# Altium PCB mezza.PcbDoc
Units mm, origin at the board's own origin, x right, y up, seen from the top; angles counter-clockwise.
Board outline 85 x 54 mm, 4 copper layers (Component Side, Ground Plane, Power Plane, Solder Side), stack 0.844 mm thick; 47 components, 91 nets, 338 pads, 80 vias.
Unrouted connection lines stored in the file: 79.
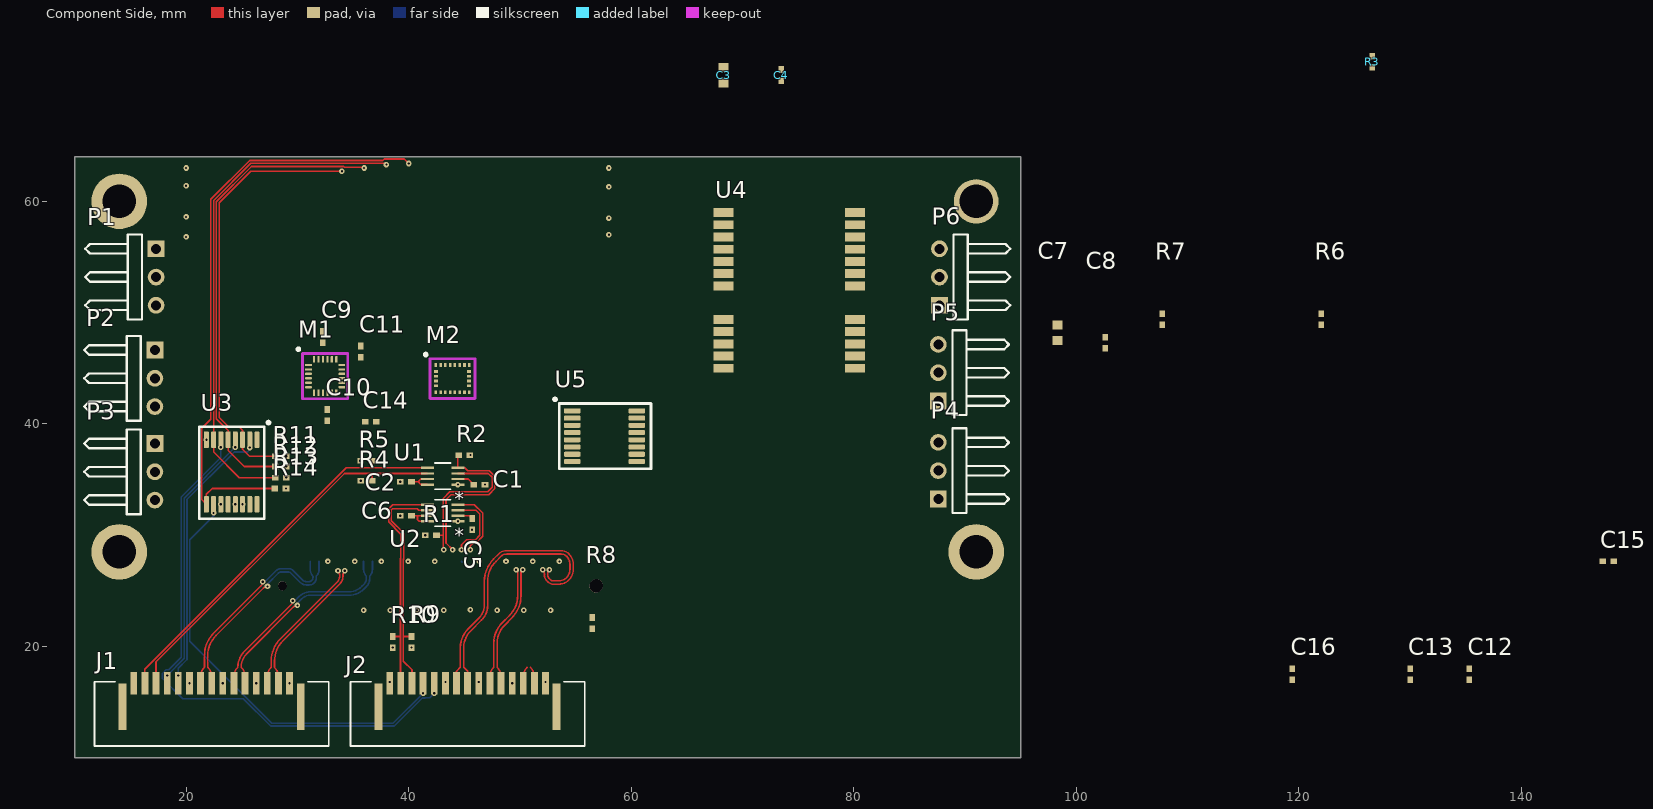
[diagram p0: Component Side view]
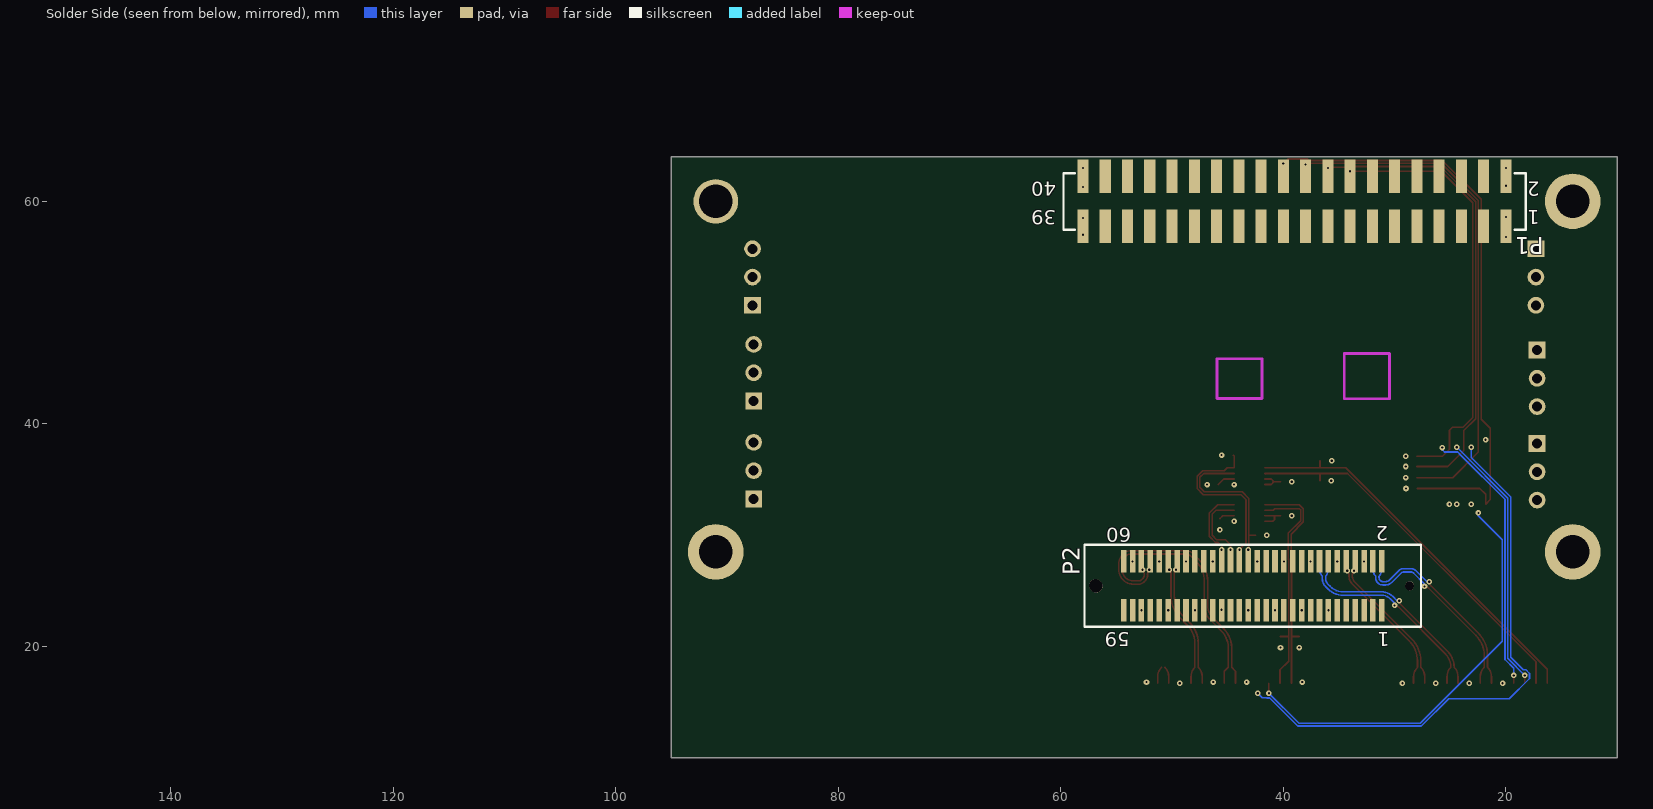
[diagram p1: Solder Side view, seen from below]
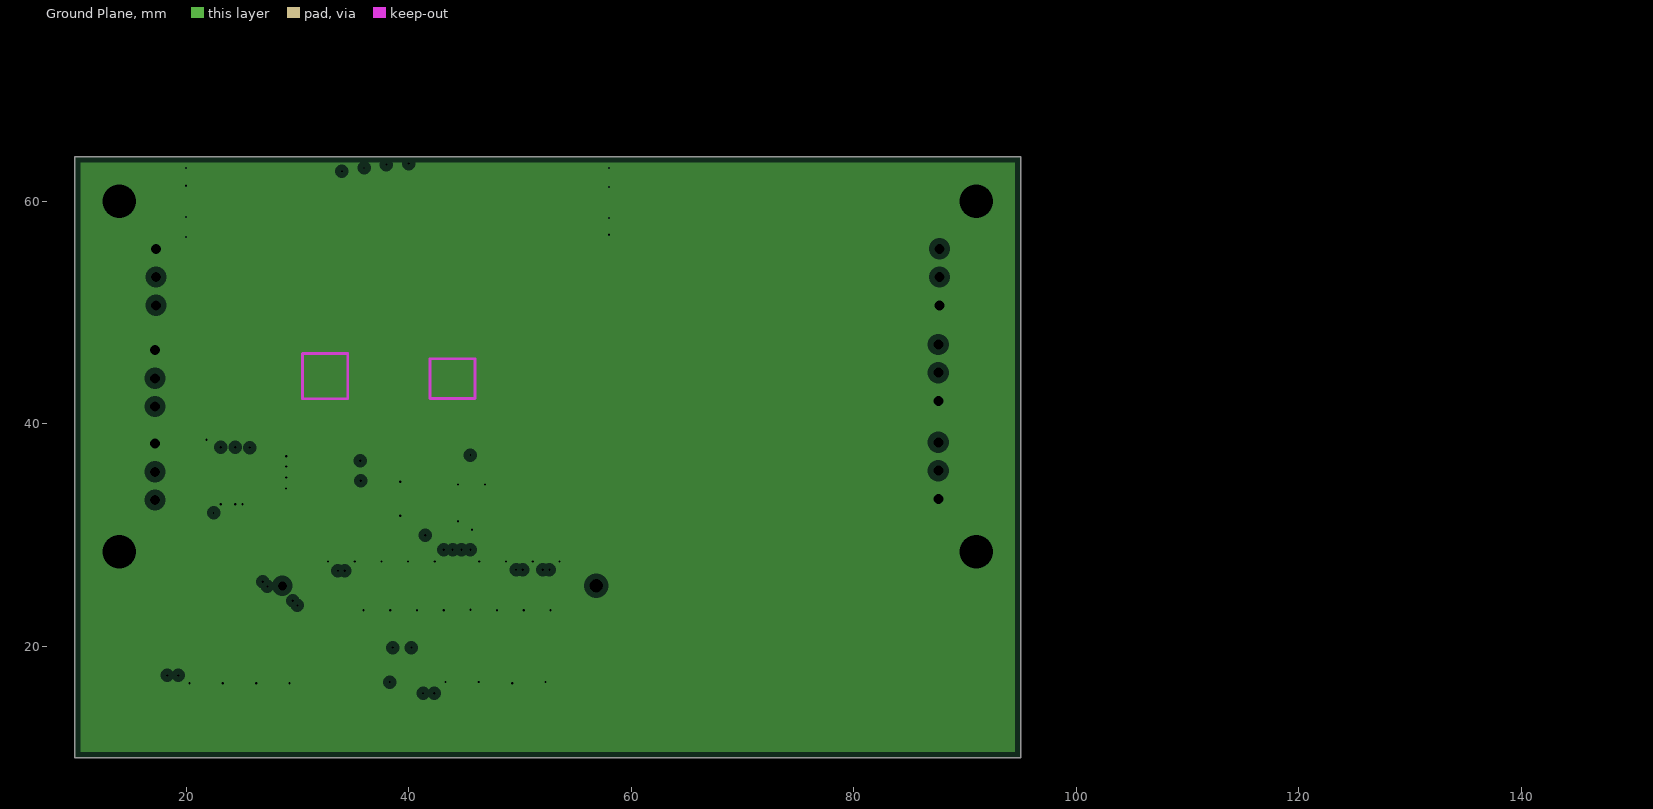
[diagram p2: Ground Plane, clearances drawn from the general rule]
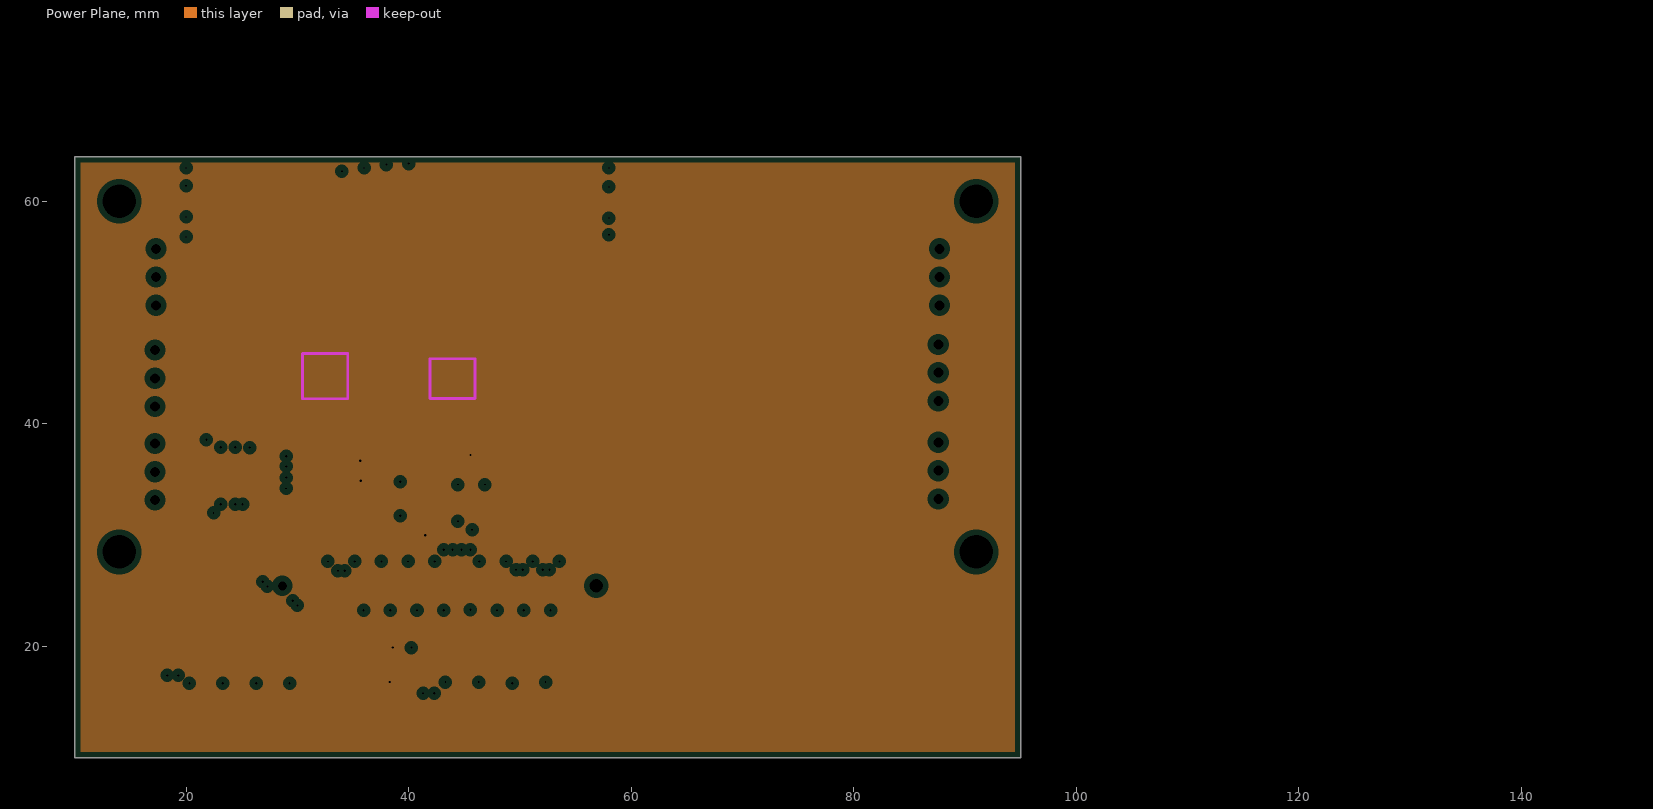
[diagram p3: Power Plane, clearances drawn from the general rule]

## Layer stack, top to bottom
Top Solder: solder mask 0.0102, Solder Resist, Dk 3.5
Component Side: signal copper 0.0356
Dielectric 1: core 0.32, FR-4, Dk 4.8
Ground Plane: plane copper 0.036, net GND
Dielectric 3: prepreg 0.127, Dk 4.2
Power Plane: plane copper 0.036, net 3V3
Dielectric 4: core 0.254, Dk 4.2
Solder Side: signal copper 0.0356
Bottom Solder: solder mask 0.0102, Solder Resist, Dk 3.5

## Board outline
10,10 95,10 95,64 10,64

## Design rules (kind name [scope] priority, off if disabled: settings)
Clearance [All] p1: gap=0.1 ignorepadtopadclearanceinfootprint=FALSE
DiffPairsRouting "Schematic Differential Pairs Routing_35" [InNet('EXP_D5_N')] p1: maxlimit=0.254 minlimit=0.1 mostfreqgap=0.15 toplayer_minwidth=0.1 toplayer_maxwidth=0.381 toplayer_prefwidth=0.15 bottomlayer_minwidth=0.1 bottomlayer_maxwidth=0.381 bottomlayer_prefwidth=0.15 maxuncoupledlength=12.7
DiffPairsRouting "Schematic Differential Pairs Routing_34" [InNet('EXP_D5_P')] p2: maxlimit=0.254 minlimit=0.1 mostfreqgap=0.15 toplayer_minwidth=0.1 toplayer_maxwidth=0.381 toplayer_prefwidth=0.15 bottomlayer_minwidth=0.1 bottomlayer_maxwidth=0.381 bottomlayer_prefwidth=0.15 maxuncoupledlength=12.7
DiffPairsRouting "Schematic Differential Pairs Routing_33" [InNet('EXP_D6_N')] p3: maxlimit=0.254 minlimit=0.1 mostfreqgap=0.15 toplayer_minwidth=0.1 toplayer_maxwidth=0.381 toplayer_prefwidth=0.15 bottomlayer_minwidth=0.1 bottomlayer_maxwidth=0.381 bottomlayer_prefwidth=0.15 maxuncoupledlength=12.7
DiffPairsRouting "Schematic Differential Pairs Routing_32" [InNet('EXP_D6_P')] p4: maxlimit=0.254 minlimit=0.1 mostfreqgap=0.15 toplayer_minwidth=0.1 toplayer_maxwidth=0.381 toplayer_prefwidth=0.15 bottomlayer_minwidth=0.1 bottomlayer_maxwidth=0.381 bottomlayer_prefwidth=0.15 maxuncoupledlength=12.7
DiffPairsRouting "Schematic Differential Pairs Routing_31" [InNet('CAM2_C_N')] p5: maxlimit=0.254 minlimit=0.1 mostfreqgap=0.15 toplayer_minwidth=0.1 toplayer_maxwidth=0.381 toplayer_prefwidth=0.15 bottomlayer_minwidth=0.1 bottomlayer_maxwidth=0.381 bottomlayer_prefwidth=0.15 maxuncoupledlength=12.7
DiffPairsRouting "Schematic Differential Pairs Routing_30" [InNet('CAM2_C_P')] p6: maxlimit=0.254 minlimit=0.1 mostfreqgap=0.15 toplayer_minwidth=0.1 toplayer_maxwidth=0.381 toplayer_prefwidth=0.15 bottomlayer_minwidth=0.1 bottomlayer_maxwidth=0.381 bottomlayer_prefwidth=0.15 maxuncoupledlength=12.7
DiffPairsRouting "Schematic Differential Pairs Routing_29" [InNet('CAM2_D0_N')] p7: maxlimit=0.254 minlimit=0.1 mostfreqgap=0.15 toplayer_minwidth=0.1 toplayer_maxwidth=0.381 toplayer_prefwidth=0.15 bottomlayer_minwidth=0.1 bottomlayer_maxwidth=0.381 bottomlayer_prefwidth=0.15 maxuncoupledlength=12.7
DiffPairsRouting "Schematic Differential Pairs Routing_28" [InNet('CAM2_D0_P')] p8: maxlimit=0.254 minlimit=0.1 mostfreqgap=0.15 toplayer_minwidth=0.1 toplayer_maxwidth=0.381 toplayer_prefwidth=0.15 bottomlayer_minwidth=0.1 bottomlayer_maxwidth=0.381 bottomlayer_prefwidth=0.15 maxuncoupledlength=12.7
DiffPairsRouting "Schematic Differential Pairs Routing_27" [InNet('CAM2_D1_N')] p9: maxlimit=0.254 minlimit=0.1 mostfreqgap=0.15 toplayer_minwidth=0.1 toplayer_maxwidth=0.381 toplayer_prefwidth=0.15 bottomlayer_minwidth=0.1 bottomlayer_maxwidth=0.381 bottomlayer_prefwidth=0.15 maxuncoupledlength=12.7
DiffPairsRouting "Schematic Differential Pairs Routing_26" [InNet('CAM2_D1_P')] p10: maxlimit=0.254 minlimit=0.1 mostfreqgap=0.15 toplayer_minwidth=0.1 toplayer_maxwidth=0.381 toplayer_prefwidth=0.15 bottomlayer_minwidth=0.1 bottomlayer_maxwidth=0.381 bottomlayer_prefwidth=0.15 maxuncoupledlength=12.7
DiffPairsRouting "Schematic Differential Pairs Routing_25" [InNet('CAM1_C_N')] p11: maxlimit=0.254 minlimit=0.1 mostfreqgap=0.15 toplayer_minwidth=0.1 toplayer_maxwidth=0.381 toplayer_prefwidth=0.15 bottomlayer_minwidth=0.1 bottomlayer_maxwidth=0.381 bottomlayer_prefwidth=0.15 maxuncoupledlength=12.7
DiffPairsRouting "Schematic Differential Pairs Routing_21" [InNet('CAM1_D1_P')] p12: maxlimit=0.254 minlimit=0.1 mostfreqgap=0.15 toplayer_minwidth=0.1 toplayer_maxwidth=0.381 toplayer_prefwidth=0.15 bottomlayer_minwidth=0.1 bottomlayer_maxwidth=0.381 bottomlayer_prefwidth=0.15 maxuncoupledlength=12.7
DiffPairsRouting "Schematic Differential Pairs Routing_18" [InNet('EXP_D3_N')] p13: maxlimit=0.254 minlimit=0.1 mostfreqgap=0.15 toplayer_minwidth=0.1 toplayer_maxwidth=0.381 toplayer_prefwidth=0.15 bottomlayer_minwidth=0.1 bottomlayer_maxwidth=0.381 bottomlayer_prefwidth=0.15 maxuncoupledlength=12.7
DiffPairsRouting "Schematic Differential Pairs Routing_17" [InNet('EXP_D2_P')] p14: maxlimit=0.254 minlimit=0.1 mostfreqgap=0.15 toplayer_minwidth=0.1 toplayer_maxwidth=0.381 toplayer_prefwidth=0.15 bottomlayer_minwidth=0.1 bottomlayer_maxwidth=0.381 bottomlayer_prefwidth=0.15 maxuncoupledlength=12.7
DiffPairsRouting "Schematic Differential Pairs Routing_16" [InNet('EXP_D2_N')] p15: maxlimit=0.254 minlimit=0.1 mostfreqgap=0.15 toplayer_minwidth=0.1 toplayer_maxwidth=0.381 toplayer_prefwidth=0.15 bottomlayer_minwidth=0.1 bottomlayer_maxwidth=0.381 bottomlayer_prefwidth=0.15 maxuncoupledlength=12.7
DiffPairsRouting "Schematic Differential Pairs Routing_15" [InNet('EXP_D1_P')] p16: maxlimit=0.254 minlimit=0.1 mostfreqgap=0.15 toplayer_minwidth=0.1 toplayer_maxwidth=0.381 toplayer_prefwidth=0.15 bottomlayer_minwidth=0.1 bottomlayer_maxwidth=0.381 bottomlayer_prefwidth=0.15 maxuncoupledlength=12.7
DiffPairsRouting "Schematic Differential Pairs Routing_14" [InNet('EXP_D4_N')] p17: maxlimit=0.254 minlimit=0.1 mostfreqgap=0.15 toplayer_minwidth=0.1 toplayer_maxwidth=0.381 toplayer_prefwidth=0.15 bottomlayer_minwidth=0.1 bottomlayer_maxwidth=0.381 bottomlayer_prefwidth=0.15 maxuncoupledlength=12.7
DiffPairsRouting "Schematic Differential Pairs Routing_13" [InNet('EXP_D3_P')] p18: maxlimit=0.254 minlimit=0.1 mostfreqgap=0.15 toplayer_minwidth=0.1 toplayer_maxwidth=0.381 toplayer_prefwidth=0.15 bottomlayer_minwidth=0.1 bottomlayer_maxwidth=0.381 bottomlayer_prefwidth=0.15 maxuncoupledlength=12.7
DiffPairsRouting "Schematic Differential Pairs Routing_12" [InNet('CAM1_D0_N')] p19: maxlimit=0.254 minlimit=0.1 mostfreqgap=0.15 toplayer_minwidth=0.1 toplayer_maxwidth=0.381 toplayer_prefwidth=0.15 bottomlayer_minwidth=0.1 bottomlayer_maxwidth=0.381 bottomlayer_prefwidth=0.15 maxuncoupledlength=12.7
DiffPairsRouting "Schematic Differential Pairs Routing_11" [InNet('CAM1_C_P')] p20: maxlimit=0.254 minlimit=0.1 mostfreqgap=0.15 toplayer_minwidth=0.1 toplayer_maxwidth=0.381 toplayer_prefwidth=0.15 bottomlayer_minwidth=0.1 bottomlayer_maxwidth=0.381 bottomlayer_prefwidth=0.15 maxuncoupledlength=12.7
DiffPairsRouting "Schematic Differential Pairs Routing_9" [InNet('EXP_D0_N')] p21: maxlimit=0.254 minlimit=0.1 mostfreqgap=0.15 toplayer_minwidth=0.1 toplayer_maxwidth=0.381 toplayer_prefwidth=0.15 bottomlayer_minwidth=0.1 bottomlayer_maxwidth=0.381 bottomlayer_prefwidth=0.15 maxuncoupledlength=12.7
DiffPairsRouting "Schematic Differential Pairs Routing_8" [InNet('EXP_D1_N')] p22: maxlimit=0.254 minlimit=0.1 mostfreqgap=0.15 toplayer_minwidth=0.1 toplayer_maxwidth=0.381 toplayer_prefwidth=0.15 bottomlayer_minwidth=0.1 bottomlayer_maxwidth=0.381 bottomlayer_prefwidth=0.15 maxuncoupledlength=12.7
DiffPairsRouting "Schematic Differential Pairs Routing_7" [InNet('EXP_D0_P')] p23: maxlimit=0.254 minlimit=0.1 mostfreqgap=0.15 toplayer_minwidth=0.1 toplayer_maxwidth=0.381 toplayer_prefwidth=0.15 bottomlayer_minwidth=0.1 bottomlayer_maxwidth=0.381 bottomlayer_prefwidth=0.15 maxuncoupledlength=12.7
DiffPairsRouting "Schematic Differential Pairs Routing_6" [InNet('CAM1_D1_N')] p24: maxlimit=0.254 minlimit=0.1 mostfreqgap=0.15 toplayer_minwidth=0.1 toplayer_maxwidth=0.381 toplayer_prefwidth=0.15 bottomlayer_minwidth=0.1 bottomlayer_maxwidth=0.381 bottomlayer_prefwidth=0.15 maxuncoupledlength=12.7
DiffPairsRouting "Schematic Differential Pairs Routing_5" [InNet('CAM1_D0_P')] p25: maxlimit=0.254 minlimit=0.1 mostfreqgap=0.15 toplayer_minwidth=0.1 toplayer_maxwidth=0.381 toplayer_prefwidth=0.15 bottomlayer_minwidth=0.1 bottomlayer_maxwidth=0.381 bottomlayer_prefwidth=0.15 maxuncoupledlength=12.7
DiffPairsRouting "Schematic Differential Pairs Routing" [InNet('EXP_D4_P')] p26: maxlimit=0.254 minlimit=0.1 mostfreqgap=0.15 toplayer_minwidth=0.1 toplayer_maxwidth=0.381 toplayer_prefwidth=0.15 bottomlayer_minwidth=0.1 bottomlayer_maxwidth=0.381 bottomlayer_prefwidth=0.15 maxuncoupledlength=12.7
DiffPairsRouting [InDifferentialPair('No Differential Pair')] p27: maxlimit=0.254 minlimit=0.254 mostfreqgap=0.254 toplayer_minwidth=0.381 toplayer_maxwidth=0.381 toplayer_prefwidth=0.381 bottomlayer_minwidth=0.381 bottomlayer_maxwidth=0.381 bottomlayer_prefwidth=0.381 maxuncoupledlength=12.7
HoleSize [All] p1: absolutevalues=TRUE maxlimit=6.2 minlimit=0.2 maxpercent=80.000 minpercent=20.000
MinimumAnnularRing [All] p1: minimumring=0.15
PlaneClearance [All] p1: clearance=0.508
PlaneConnect [All] p1: planeconnectstyle=Relief reliefexpansion=0.508 reliefentries=4 reliefconductorwidth=0.254 reliefairgap=0.254
PolygonConnect [All] p1: connectstyle=Relief reliefconductorwidth=0.254 reliefentries=4 polygonreliefangle="90 Angle" airgapwidth=0.254
RoomDefinition mezza [InComponentClass('mezza')] p1: confinementstyle=ConfineOut formatcopy=TRUE lockcomponents=FALSE outline 58,25.7 95,25.7 95,10 58,10
RoutingVias [All] p1: holewidth=0.3 width=0.75 viastyle="Through Hole" minholewidth=0.2 minwidth=0.5 maxholewidth=0.711 maxwidth=1.27
SolderMaskExpansion [All] p1: expansion=0.102
Width [All] p1: maxlimit=0.254 minlimit=0.1 preferedwidth=0.15
26 further rules are at their usual default settings.

## Classes and differential pairs
component class esc: P1 P2 P3 P4 P5 P6 U5
differential pair class CSI: CAM1_C CAM1_D0 CAM1_D1 CAM2_C CAM2_D0 CAM2_D1 EXP_D0 EXP_D1 EXP_D2 EXP_D3 EXP_D4 EXP_D5 EXP_D6
component class GPS: U4
component class 9DOF_Sensors: C10 C11 C12 C13 C14 C15 C16 C? M1 M2
component class Camera: C1 C2 C3 C4 C5 C6 C7 C8 J1 J2 R1 R2 R3 R4 R5 R6 R7 R8 R9 R10 R11 R12 R13 R14 U1 U2 U3
component class mezza: P1 P2
differential pair USB_D: +USB_D_P -USB_D_N
differential pair EXP_D6: +EXP_D6_P -EXP_D6_N
differential pair EXP_D5: +EXP_D5_P -EXP_D5_N
differential pair EXP_D4: +EXP_D4_P -EXP_D4_N
differential pair EXP_D3: +HSIC_STR -EXP_D3_N
differential pair EXP_D2: +EXP_D2_P -EXP_D2_N
differential pair EXP_D1: +EXP_D1_P -EXP_D1_N
differential pair EXP_D0: +EXP_D0_P -EXP_D0_N
differential pair CAM2_D1: +CAM2_D1_P -CAM2_D1_N
differential pair CAM2_D0: +CAM2_D0_P -CAM2_D0_N
differential pair CAM2_C: +CAM2_C_P -CAM2_C_N
differential pair CAM1_D1: +CAM1_D1_P -CAM1_D1_N
differential pair CAM1_D0: +CAM1_D0_P -CAM1_D0_N
differential pair CAM1_C: +CAM1_C_P -CAM1_C_N

## Components (designator, comment, footprint, x,y, rotation, side; value= is the part's Value field where it differs from the comment)
C1 "Cap" 0402 46.354,34.55 r180 top value=0.1uF
C2 "Cap" 0402 39.754,34.8 r0 top value=0.1uF
C3 "0603" 1608[0603] 68.3,71.35 r90 top value=10uF
C4 "0402" 0402 73.5,71.35 r90 top value=0.1uF
C5 "Cap" 0402 45.7,31 r90 top value=0.1uF
C6 "Cap" 0402 39.754,31.75 r0 top value=0.1uF
C7 "0603" 1608[0603] 98.3,48.2 r90 top value=10uF
C8 "0402" 0402 102.6,47.3 r90 top value=0.1uF
C9 "Ceramic, X7R, 0.1uF +- 10%, 2V" 0402 32.3,47.8 r90 top value=10nF
C10 "Ceramic, X7R, 0.1uF +- 10%, 2V" 0402 32.701,40.8 r270 top value=0.1uF
C11 "Ceramic, X7R, 0.1uF +- 10%, 4V" 0402 35.7,46.5 r90 top value=0.1uF
C12 "Cap" 0402 135.3,17.5 r90 top value=100nF
C13 "Cap" 0402 130,17.5 r90 top value=10uF
C14 "Cap" 0402 36.6,40.2 r180 top value=100nF
C15 "Cap" 0402 147.8,27.65 r180 top value=100nF
C16 "Cap" 0402 119.4,17.5 r90 top value=10uF
J1 "FCC_Connector" CON15_1X15_DRB_S 22.3,19.456 r180 top locked
J2 "FCC_Connector" CON15_1X15_DRB_S 45.3,19.456 r180 top locked
M1 "MPU-9250" MPU-9250 32.5,44.3 r0 top locked
M2 "LSM9DS1" LSM9DS1 43.945,44.075 r0 top locked
P1 "Header 3H" HDR1X3H 17.3,55.74 r270 top
P1 "low-speed_connector" low-speed_connector_SM 20,61 r0 bottom locked
P2 "Header 3H" HDR1X3H 17.2,46.64 r270 top
P2 "High-speed_connector" high-speed_connector 42.75,25.45 r0 bottom locked
P3 "Header 3H" HDR1X3H 17.2,38.24 r270 top
P4 "Header 3H" HDR1X3H 87.6,33.26 r90 top
P5 "Header 3H" HDR1X3H 87.6,42.06 r90 top
P6 "Header 3H" HDR1X3H 87.7,50.66 r90 top
R1 "Res1" 0402 42,30 r0 top
R2 "Res1" 0402 45,37.2 r180 top
R3 "Res1" 0402 126.6,72.55 r90 top
R4 "Res1" 0402 36.2,34.9 r0 top
R5 "Res1" 0402 36.2,36.7 r0 top
R6 "Res1" 0402 122,49.4 r90 top
R7 "Res1" 0402 107.7,49.4 r90 top
R8 "Res1" 0402 56.5,22.1 r90 top
R9 "Res1" 0402 40.254,20.4 r90 top
R10 "Res1" 0402 38.563,20.4 r90 top
R11 "Res1" 0402 28.5,37.1 r0 top
R12 "Res1" 0402 28.5,36.177 r0 top
R13 "Res1" 0402 28.5,35.177 r0 top
R14 "Res1" 0402 28.482,34.2 r0 top
U1 "PCA9306DP1" DCU8 43.054,35.3 r180 top locked
U2 "PCA9306DP1" DCU8 43.054,32 r180 top locked
U3 "CD4504BPWR" CD4504BPWR_16TSSOP 24.1,35.677 r270 top locked
U4 "NEO-8Q/M8" NEO-8Q/M8 80.3,60 r180 top
U5 "CD4504BPWR" CD4504BPWR_16TSSOP 57.6,38.9 r0 top

## Footprints (in the part's own frame and the unit in brackets; to place one, negate y for a bottom-side part, rotate by r counter-clockwise, add the part's x,y. Pads: shape width x height; smd on the part's side, far side on the other; paste and mask are expansions set on the pad)
0402 [mm] "Chip Capacitor, Body 1.0x0.5mm, IPC High Density"
  rect 0.6x0.5 smd: 1(-0.5,0) 2(0.5,0)
  body extent -0.55,-0.3 0.55,0.3, height 1.3
1608[0603] [mm] "Chip Capacitor, Body 1.6x0.8mm, IPC High Density"
  rect 0.8x0.9 smd: 1(-0.7,0) 2(0.7,0)
  body extent -0.87,-0.48 0.87,0.48, height 1.3
CD4504BPWR_16TSSOP [mm]
  rrect50% 1.5x0.45 smd: 1(-2.9,2.275) 2(-2.9,1.625) 3(-2.9,0.975) 4(-2.9,0.325) 5(-2.9,-0.325) 6(-2.9,-0.975) 7(-2.9,-1.625) 8(-2.9,-2.275) 9(2.9,-2.275) 10(2.9,-1.625) 11(2.9,-0.975) 12(2.9,-0.325) 13(2.9,0.325) 14(2.9,0.975) 15(2.9,1.625) 16(2.9,2.275)
  silkscreen extent -4.57,-2.92 4.19,3.43
CON15_1X15_DRB_S [mil]
  rect 24x79 smd: 1(275.59,108.5) 2(236.22,108.5) 3(196.85,108.5) 4(157.48,108.5) 5(118.11,108.5) 6(78.74,108.5) 7(39.37,108.5) 8(0,108.5) 9(-39.37,108.5) 10(-78.74,108.5) 11(-118.11,108.5) 12(-157.48,108.5) 13(-196.85,108.5) 14(-236.22,108.5) 15(-275.59,108.5)
  rect 28x165 smd: 16(-315,191.5) 17(315,191.5)
  silkscreen extent -415,103 415,331, body extent 0,0 10,10, height 10
DCU8 [mm]
  rect 1.157x0.214 smd paste+0 mask+0: 1(-1.372,0.75) 2(-1.372,0.25) 3(-1.372,-0.25) 4(-1.372,-0.75) 5(1.372,-0.75) 6(1.372,-0.25) 7(1.372,0.25) 8(1.372,0.75)
  silkscreen extent -0.72,-1.18 0.72,1.18, body extent -1.6,-1.05 1.6,1.05, height 0.89
HDR1X3H [mm] "Connector; Header; 3 Position; Right Angle"
  rect 1.5x1.5 hole 0.9: 1(0,0)
  round 1.5 hole 0.9: 2(2.54,0) 3(5.08,0)
  silkscreen extent -1.27,-6.35 6.35,-1.27
high-speed_connector [mm] "high-speed connector"
  rect 0.5x2 smd: 1(-11.6,2.2) 2(-11.6,-2.2) 3(-10.8,2.2) 4(-10.8,-2.2) 5(-10,2.2) 6(-10,-2.2) 7(-9.2,2.2) 8(-9.2,-2.2) 9(-8.4,2.2) 10(-8.4,-2.2) 11(-7.6,2.2) 12(-7.6,-2.2) 13(-6.8,2.2) 14(-6.8,-2.2) 15(-6,2.2) 16(-6,-2.2) 17(-5.2,2.2) 18(-5.2,-2.2) 19(-4.4,2.2) 20(-4.4,-2.2) 21(-3.6,2.2) 22(-3.6,-2.2) 23(-2.8,2.2) 24(-2.8,-2.2) 25(-2,2.2) 26(-2,-2.2) 27(-1.2,2.2) 28(-1.2,-2.2) 29(-0.4,2.2) 30(-0.4,-2.2) 31(0.4,2.2) 32(0.4,-2.2) 33(1.2,2.2) 34(1.2,-2.2) 35(2,2.2) 36(2,-2.2) 37(2.8,2.2) 38(2.8,-2.2) 39(3.6,2.2) 40(3.6,-2.2) 41(4.4,2.2) 42(4.4,-2.2) 43(5.2,2.2) 44(5.2,-2.2) 45(6,2.2) 46(6,-2.2) 47(6.8,2.2) 48(6.8,-2.2) 49(7.6,2.2) 50(7.6,-2.2) 51(8.4,2.2) 52(8.4,-2.2) 53(9.2,2.2) 54(9.2,-2.2) 55(10,2.2) 56(10,-2.2) 57(10.8,2.2) 58(10.8,-2.2) 59(11.6,2.2) 60(11.6,-2.2)
  round 0.8 hole 0.8 unplated: ""(-14.1,0)
  round 1.2 hole 1.2 unplated: ""(14.1,0)
  silkscreen extent -15.11,-3.68 15.11,3.68, body extent -14.9,-3 14.9,3, height 7.65
low-speed_connector_SM [mm] "Surface mount low-speed connector / 2mm pitch"
  rect 1x3 smd: 1(0,3.25) 2(0,-1.25) 3(2,3.25) 4(2,-1.25) 5(4,3.25) 6(4,-1.25) 7(6,3.25) 8(6,-1.25) 9(8,3.25) 10(8,-1.25) 11(10,3.25) 12(10,-1.25) 13(12,3.25) 14(12,-1.25) 15(14,3.25) 16(14,-1.25) 17(16,3.25) 18(16,-1.25) 19(18,3.25) 20(18,-1.25) 21(20,3.25) 22(20,-1.25) 23(22,3.25) 24(22,-1.25) 25(24,3.25) 26(24,-1.25) 27(26,3.25) 28(26,-1.25) 29(28,3.25) 30(28,-1.25) 31(30,3.25) 32(30,-1.25) 33(32,3.25) 34(32,-1.25) 35(34,3.25) 36(34,-1.25) 37(36,3.25) 38(36,-1.25) 39(38,3.25) 40(38,-1.25)
  silkscreen extent -1.78,-1.52 39.75,3.56, body extent -1.65,-2.29 39.62,4.3, height 6
LSM9DS1 [mm]
  rect 0.23x0.35 smd mask+0.05: 1(-1.505,1.225) 6(-1.505,-1.225) 7(-1.075,-1.225) 8(-0.645,-1.225) 9(-0.215,-1.225) 10(0.215,-1.225) 11(0.645,-1.225) 12(1.075,-1.225) 13(1.505,-1.225) 18(1.505,1.225) 19(1.075,1.225) 20(0.645,1.225) 21(0.215,1.225) 22(-0.215,1.225) 23(-0.645,1.225) 24(-1.075,1.225)
  rect 0.35x0.23 smd mask+0.05: 2(-1.475,0.635) 3(-1.475,0.215) 4(-1.475,-0.215) 5(-1.475,-0.635) 14(1.475,-0.635) 15(1.475,-0.215) 16(1.475,0.215) 17(1.475,0.635)
  Keep-Out Layer lines w0.254: -2.032,-1.778 2.032,-1.778 2.032,1.778 -2.032,1.778 -2.032,-1.778
  silkscreen extent -2.54,2.03 -2.29,2.29
MPU-9250 [mm]
  rrect50% 0.6x0.2 smd mask+0.05: 1(-1.5,1) 2(-1.5,0.6) 3(-1.5,0.2) 4(-1.5,-0.2) 5(-1.5,-0.6) 6(-1.5,-1) 14(1.5,-0.6) 15(1.5,-0.2) 16(1.5,0.2) 17(1.5,0.6) 18(1.5,1)
  rrect50% 0.2x0.6 smd mask+0.05: 7(-1,-1.5) 8(-0.6,-1.5) 9(-0.2,-1.5) 10(0.2,-1.5) 11(0.6,-1.5) 12(1,-1.5) 19(1,1.5) 20(0.6,1.5) 21(0.2,1.5) 22(-0.2,1.5) 23(-0.6,1.5) 24(-1,1.5)
  rrect50% 0.6x0.2 smd paste+0 mask+0.05: 13(1.5,-1)
  Keep-Out Layer lines w0.254: -2.032,-2.032 -2.032,2.032 2.032,2.032 2.032,-2.032 -2.032,-2.032
  silkscreen extent -2.54,2.29 -2.29,2.54
NEO-8Q/M8 [mm]
  rect 1.8x0.8 smd mask+0.1: 1(12,1)
  rect 1.8x0.8 smd: 2(12,2.1) 3(12,3.2) 4(12,4.3) 5(12,5.4) 6(12,6.5) 7(12,7.6) 8(12,10.6) 9(12,11.7) 10(12,12.8) 11(12,13.9) 12(12,15) 13(0.2,15) 14(0.2,13.9) 15(0.2,12.8) 16(0.2,11.7) 17(0.2,10.6) 18(0.2,7.6) 19(0.2,6.5) 20(0.2,5.4) 21(0.2,4.3) 22(0.2,3.2) 23(0.2,2.1) 24(0.2,1)

## Part data
C1 C2 C5 C6 C12 C13 C14 C15 C16: "Capacitor", LatestRevisionDate=17-Jul-2002, LatestRevisionNote="Re-released for DXP Platform.", PackageDescription="Radial Cap, Thru-Hole; 2 Leads; 0.3 in Pin Spacing", PackageReference=RAD-0.3, Published=8-Jun-2000, Publisher="Altium Limited"
C3 C4 C7 C8 C9 C10 C11: library part Cap, "Capacitor", LatestRevisionDate=17-Jul-2002, LatestRevisionNote="Re-released for DXP Platform.", PackageDescription="Radial Cap, Thru-Hole; 2 Leads; 0.3 in Pin Spacing", PackageReference=RAD-0.3, Published=8-Jun-2000, Publisher="Altium Limited"
P1 P2 P3 P4 P5 P6: "Header, 3-Pin, Right Angle", LatestRevisionDate=17-Jul-2002, LatestRevisionNote="Re-released for DXP Platform.", Publisher="Altium Limited"
P1: PartNumber=55510-140LF, Supplier Part Number 1=609-2696-ND, Supplier 1=Digi-Key
P2: PartNumber=61083-063402LF, Supplier Part Number 1=609-1679-2-ND, Supplier 1=Digi-Key
R1 R2 R3 R4 R5 R6 R7 R8 R9 R10 R11 R12 R13 R14: "Resistor", LatestRevisionDate=17-Jul-2002, LatestRevisionNote="Re-released for DXP Platform.", PackageDescription="Axial Device, Thru-Hole; 2 Leads; 0.3 in Pin Spacing", PackageReference=AXIAL-0.3, Published=8-Jun-2000, Publisher="Altium Limited"
U1 U2: library part PCA9306

## Free pads (board coordinates)
  round 5 hole 3: ""(14,28.5) ""(14,60) ""(91,28.5)
  round 4 hole 3: ""(91,60)

## Via types
v1: diameter 0.5, hole 0.2, Component Side to Solder Side, 80 vias

## Nets (pads, with @x,y where several pads share a name; then routed paths per layer and width w, separated by ;. In a path a pad name is that pad's centre, name@x,y a point inside that pad or via, vN(x,y) a via of type N, cw(c..) or ccw(c..) an arc to the next point about the centre after c; other vN are vias at no path point)
1V8: C1.2 C5.2 M1.1 M1.8 M2.1 M2.3 U1.2 U2.2 U3.1 U5.1 | length 3
  Component Side w0.15: U2.2 45.45,31.75 C5.2 ; U1.2 45.354,35.05 C1.2
3V3: C3.2 C4.2 C7.2 C8.2 C15.2 C16.2 J1.1 J2.1 M1.13 M2.22 M2.23 R1.1 R2.1 R3.1 R4.1 R5.1 R6.1 R7.1 R8.1 R10.1 U3.16 U4.22 U4.23
  other v1: 38.3,16.8 38.563,19.9 41.5,30 35.7,34.9 35.65,36.7 45.55,37.2
5V0: P1.3@17.3,50.66 U5.16
+1V8: P1.35
+5V: P1.37
CAM1_C_N: J1.8 P2.4 | length 18.4
  Component Side w0.15: J1.8 22.3,17.283 ccw(c21.105,17.283) 21.95,18.128 21.95,19.198 cw(c24.49,19.198) 22.694,20.994 26.953,25.253 ; 26.953,25.253 cw(c27.315,24.89) v1(27.315,25.403)
  Solder Side w0.15: v1(27.315,25.403) 27.315,25.565 cw(c27.435,25.565) 27.35,25.65 28.3,26.6 cw(c28.541,26.359) 28.541,26.7 29.171,26.7 cw(c29.171,26.34) 29.426,26.595 30.273,25.748 ; 30.273,25.747 ccw(c30.8,26.274) 30.8,25.529 31.052,25.529 ccw(c31.052,26.179) 31.512,25.72 ccw(c31.059,26.173) 31.7,26.173 31.7,26.325 ccw(c31.096,26.929) 31.95,26.929 P2.4
CAM1_C_P: J1.7 P2.2@31.15,27.65 | length 18.4
  Component Side w0.15: J1.7 21.3,17.283 cw(c22.495,17.283) 21.65,18.128 21.65,19.198 cw(c24.49,19.198) 22.482,21.206 26.74,25.465 ; 26.741,25.465 ccw(c26.378,25.827) v1(26.89,25.827)
  Solder Side w0.15: v1(26.89,25.827) 27.053,25.827 ccw(c27.053,25.947) 27.138,25.862 28.088,26.812 cw(c28.541,26.359) 28.541,27 29.171,27 cw(c29.171,26.34) 29.638,26.807 30.485,25.96 ccw(c30.8,26.274) 30.8,25.829 31.053,25.829 ccw(c31.053,26.179) 31.3,25.932 ccw(c31.059,26.173) 31.4,26.173 31.4,26.325 cw(c32.004,26.929) 31.15,26.929 P2.2@31.15,27.65
CAM1_D0_N: J1.14 P2.10 | length 12.6
  Component Side w0.15: J1.14 28.3,17.283 ccw(c27.105,17.283) 27.95,18.128 27.95,18.698 cw(c30.49,18.698) 28.694,20.494 33.817,25.617 ccw(c33.134,26.3) 34.1,26.3 34.1,26.438 cw(c34.612,26.438) v1(34.25,26.8)
CAM1_D0_P: J1.13 P2.8 | length 12.6
  Component Side w0.15: J1.13 27.3,17.283 cw(c28.495,17.283) 27.65,18.128 27.65,18.698 cw(c30.49,18.698) 28.482,20.706 33.605,25.829 ccw(c33.134,26.3) 33.8,26.3 33.8,26.438 ccw(c33.288,26.438) v1(33.65,26.8)
CAM1_D1_N: J1.11 P2.16 | length 18.5
  Component Side w0.15: J1.11 25.3,17.283 ccw(c24.105,17.283) 24.95,18.128 cw(c26.692,18.128) 25.46,19.36 29.644,23.544 cw(c30.006,23.182) v1(30.006,23.694)
  Solder Side w0.15: v1(30.006,23.694) 30,23.7 30,23.9 30.392,24.292 cw(c31.15,23.534) 31.15,24.606 34.608,24.606 ccw(c34.608,26.592) 36.012,25.188 36.2,25.376 ccw(c35.476,26.1) 36.5,26.1 36.5,26.325 ccw(c35.896,26.929) 36.75,26.929 P2.16
CAM1_D1_P: J1.10 P2.14 | length 18.5
  Component Side w0.15: J1.10 24.3,17.283 cw(c25.495,17.283) 24.65,18.128 cw(c26.692,18.128) 25.248,19.572 29.432,23.756 ccw(c29.07,24.118) v1(29.582,24.118)
  Solder Side w0.15: v1(29.582,24.118) 29.588,24.112 29.788,24.112 30.18,24.504 cw(c31.15,23.534) 31.15,24.906 34.608,24.906 ccw(c34.608,26.592) 35.8,25.4 35.988,25.588 ccw(c35.476,26.1) 36.2,26.1 36.2,26.325 cw(c36.804,26.929) 35.95,26.929 P2.14
CAM1_GPIO0_3V3: J1.5 U3.2 | length 24.5
  Component Side w0.15: J1.5 v1(19.3,17.4)
  Solder Side w0.15: v1(19.3,17.4) 19.3,18.046 20.08,18.826 20.08,33.226 24.054,37.2 ; 24.055,37.2 24.33,37.475 25.523,37.475 25.725,37.677 v1(25.725,37.875)
CAM1_GPIO1_3V3: J1.4 U3.4 | length 23.8
  Component Side w0.15: J1.4 v1(18.3,17.4)
  Solder Side w0.15: v1(18.3,17.4) 19.83,18.93 19.83,33.33 23.95,37.45 ; 23.951,37.45 24.2,37.699 ; 24.2,37.7 24.4,37.9 v1(24.425,37.9)
CAM1_GPIO_0: P1.16 R11.1 U3.3 | length 39
  Component Side w0.15: R11.1 25.7,37.1 25.075,37.725 U3.3 25.075,39.425 24.8,39.7 23.854,39.7 22.975,40.579 22.975,59.871 25.804,62.7 v1(34,62.7)
CAM1_GPIO_1: P1.18 R12.1 U3.5 | length 42.2
  Component Side w0.15: R12.1 25.223,36.177 23.775,37.625 U3.5 23.775,39.425 22.725,40.475 22.725,59.975 25.875,63.125 34.176,63.125 34.251,63.05 35.95,63.05 v1(36,63)
CAM1_SCL: P2.32 R1.2 U1.3 | length 14.2
  Component Side w0.15: R1.2 43.1,30 ; v1(43.15,28.7) 43.1,28.75 43.1,30 ; U1.3 47.15,35.55 47.5,35.2 47.5,34.3 47.1,33.9 43.7,33.9 43.1,33.3 43.1,30
CAM1_SCL_3V3: J1.3 R4.2 U1.6 | length 34
  Component Side w0.15: J1.3 17.3,18.616 34.234,35.55 36.7,35.55 ; R4.2 36.7,35.55 ; U1.6@41.632,35.5 U1.6 36.7,35.55
CAM1_SDA: P2.34 R2.2 U1.4 | length 15.5
  Component Side w0.15: v1(43.95,28.7) 43.35,29.3 43.35,33.196 43.804,33.65 47.204,33.65 47.75,34.196 47.75,35.304 47.254,35.8 45.3,35.8 45.05,36.05 U1.4 44.426,37.126 R2.2
CAM1_SDA_3V3: J1.2 R5.2 U1.5 | length 34.8
  Component Side w0.15: J1.2 16.3,17.97 34.38,36.05 36.7,36.05 ; R5.2 36.7,36.05 ; U1.5 36.7,36.05
CAM2_C_N: J2.8 P2.56 | length 23.3
  Component Side w0.15: J2.8 45.3,17.778 44.95,18.128 44.95,19.9 cw(c47.058,19.9) 45.567,21.39 46.551,22.374 ccw(c45.224,23.7) 47.1,23.7 47.1,25.848 cw(c49.64,25.848) 47.844,27.644 48.3,28.1 cw(c48.812,27.588) 48.812,28.312 53.688,28.312 cw(c53.688,27.588) 54.2,28.1 cw(c53.476,27.376) 54.5,27.376 54.5,26.924 cw(c53.476,26.924) 54.2,26.2 cw(c53.476,26.924) 53.476,25.9 52.991,25.9 cw(c52.991,26.241) 52.75,26 52.606,26.144 cw(c52.862,26.4) 52.5,26.4 52.5,26.538 cw(c53.012,26.538) 52.583,26.817 cw(c53.012,26.538) v1(52.65,26.9)
CAM2_C_P: J2.7 P2.54 | length 25.4
  Component Side w0.15: J2.7 44.3,17.778 44.65,18.128 44.65,19.9 cw(c47.058,19.9) 45.355,21.602 46.338,22.586 ccw(c45.224,23.7) 46.8,23.7 46.8,25.848 cw(c49.64,25.848) 47.632,27.856 48.088,28.312 cw(c48.812,27.588) 48.812,28.612 53.688,28.612 cw(c53.688,27.588) 54.412,28.312 cw(c53.476,27.376) 54.8,27.376 54.8,26.924 cw(c53.476,26.924) 54.412,25.988 cw(c53.476,26.924) 53.476,25.6 52.991,25.6 cw(c52.991,26.241) 52.538,25.788 52.394,25.932 cw(c52.862,26.4) 52.2,26.4 52.2,26.538 ccw(c51.688,26.538) v1(52.05,26.9) cw(c52.05,26.779) 52.135,26.865 v1@52.2,26.8
CAM2_D0_N: J2.14 P2.44 | length 1.5
  Component Side w0.15: 50.95,18.128 cw(c50.105,17.283) 51.3,17.283 J2.14
CAM2_D0_P: J2.13 P2.42 | length 1.5
  Component Side w0.15: J2.13 50.3,17.283 cw(c51.495,17.283) 50.65,18.128
CAM2_D1_N: J2.11 P2.50 | length 11
  Component Side w0.15: J2.11 48.3,17.283 ccw(c47.105,17.283) 47.95,18.128 47.95,20.3 cw(c50.244,20.3) 48.622,21.922 49.268,22.568 ccw(c47.26,24.576) 50.1,24.576 50.1,26.8 50.165,26.865 cw(c50.25,26.779) v1(50.25,26.9)
CAM2_D1_P: J2.10 P2.48 | length 11
  Component Side w0.15: J2.10 47.3,17.283 cw(c48.495,17.283) 47.65,18.128 47.65,20.3 cw(c50.244,20.3) 48.41,22.134 49.056,22.78 ccw(c47.26,24.576) 49.8,24.576 49.8,26.8 49.735,26.865 ccw(c49.65,26.779) v1(49.65,26.9)
CAM2_GPIO0_3V3: J2.5 U3.6 | length 50.5
  Solder Side w0.15: v1(23.125,37.9) 23.125,36.979 19.58,33.434 19.58,19.034 18.447,17.901 18.2,17.901 17.875,17.576 17.875,17.125 19.7,15.3 25.146,15.3 27.596,12.85 38.704,12.85 41.229,15.375 41.476,15.375 41.501,15.4 41.9,15.4 v1(42.3,15.8)
CAM2_GPIO1_3V3: J2.4 U3.10 | length 38.5
  Component Side w0.15: v1(41.3,15.8) J2.4
  Solder Side w0.15: v1(22.475,32) 22.475,31.75 20.33,29.605 20.33,20.47 27.7,13.1 38.6,13.1 v1(41.3,15.8)
CAM2_GPIO_0: P1.20 R13.1 U3.7 | length 46
  Component Side w0.15: R13.1 24.773,35.177 22.475,37.475 U3.7 22.475,60.079 25.821,63.425 37.875,63.425 v1(38,63.3)
CAM2_GPIO_1: P1.22 R14.1 U3.9 | length 54.6
  Component Side w0.15: R14.1 22.35,34.2 21.825,33.675 U3.9 21.4,33.202 21.4,39.6 22.225,40.425 22.225,60.182 25.718,63.675 37.675,63.675 37.8,63.8 39.6,63.8 v1(40,63.4)
CAM2_SCL: P2.36 R6.2 U2.3 | length 6.5
  Component Side w0.15: U2.3 46.05,32.25 46.4,31.9 46.4,30 46,29.6 45.2,29.6 44.75,29.15 v1(44.75,28.7)
  Solder Side w0.15: P2.36 P2.36@44.8,27.6
CAM2_SCL_3V3: J2.3 R9.2 U2.6 | length 20.4
  Component Side w0.15: R9.2 39.525,20.9 ; J2.3 40.3,17.9 39.525,18.675 39.525,20.9 ; U2.6 40.9,32.25 40.763,32.387 38.563,32.387 38.45,32.273 38.45,31.304 39.55,30.204 39.55,27.851 39.525,27.826 39.525,20.9
CAM2_SDA: P2.38 R7.2 U2.4 | length 6.4
  Component Side w0.15: U2.4 45.904,32.75 46.65,32.004 46.65,29.896 46.104,29.35 45.85,29.35 45.55,29.05 v1(45.55,28.7)
CAM2_SDA_3V3: J2.2 R10.2 U2.5 | length 20.5
  Component Side w0.15: R10.2 39.275,20.9 ; J2.2 39.275,16.725 39.275,20.9 ; U2.5 38.573,32.75 38.2,32.377 38.2,31.2 39.3,30.1 39.3,27.955 39.275,27.93 39.275,20.9
ESC1_PWM: P1.29 U5.3
ESC2_PWM: P1.30 U5.5
ESC3_PWM: P1.31 U5.7
ESC4_PWM: P1.32 U5.9
ESC5_PWM: P1.33 U5.11
ESC6_PWM: P1.34 U5.14
EXP_D0_N: P2.23
EXP_D0_P: P2.21
EXP_D1_N: P2.29
EXP_D1_P: P2.27
EXP_D2_N: P2.35
EXP_D2_P: P2.33
EXP_D3_N: P2.41
EXP_D3_P: P2.39
EXP_D4_N: P2.47
EXP_D4_P: P2.45
EXP_D5_N: P2.22
EXP_D5_P: P2.20
EXP_D6_N: P2.28
EXP_D6_P: P2.26
EXP_SPI_CS: P2.7
EXP_SPI_MISO: P2.11
EXP_SPI_MOSI: P2.1@31.15,23.25
EXP_SPI_SCLK: P2.9
GND: C1.1 C2.1 C3.1 C4.1 C5.1 C6.1 C7.1 C8.1 C13.1 C14.1 C15.1 C16.1 J1.6 J1.9 J1.12 J1.15 J2.6 J2.9 J2.12 J2.15 M1.11 M1.18 M1.20 M2.14 M2.15 M2.16 M2.17 M2.18 M2.19 M2.20 P1.1 P1.2@20,62.25 P1.39 P1.40 P2.1@17.2,46.64 P2.6 P2.12 P2.13 P2.18 P2.19 P2.24 P2.25 P2.30 P2.31 P2.37 P2.40 P2.43 P2.46 P2.49 P2.52 P2.55 P2.58 P3.1 P4.1 P5.1 P6.1 pad. R11.2 R12.2 R13.2 R14.2 U1.1 U2.1 U3.8 U3.11 U3.13 U3.14 U4.2 U4.7 U4.10 U4.12 U4.13 U4.24 U5.8 U5.13
  other v1: 20.3,16.7 23.3,16.7 26.3,16.7 29.3,16.7 49.3,16.7 43.3,16.8 46.3,16.8 52.3,16.8 35.95,23.25 38.35,23.25 40.75,23.25 43.15,23.25 47.95,23.25 50.35,23.25 52.75,23.25 45.55,23.3 32.75,27.65 35.15,27.65 37.55,27.65 39.95,27.65 42.35,27.65 46.35,27.65 48.75,27.65 51.15,27.65 53.55,27.65 45.7,30.5 44.426,31.25 39.254,31.75 23.125,32.777 24.425,32.777 25.075,32.777 28.982,34.2 44.426,34.55 46.854,34.55 39.254,34.8 29,35.177 29,36.177 29,37.1 21.825,38.577 20,56.8 58,57 58,58.5 20,58.6 58,61.3 20,61.4 20,63 58,63
HSIC_DATA: P2.59
HSIC_STR: 
LSM9DS1_AG_CS: M2.7
LSM9DS1_M_CS: M2.8
MPU9250_CS: M1.22
NetC2_2: C2.2 R3.2 U1.7 U1.8 | length 2.5
  Component Side w0.15: C2.2 40.85,34.8 ; U1.8 41.1,34.55 40.85,34.8 ; U1.7 41.1,35.05 40.85,34.8
NetC6_2: C6.2 R8.2 U2.7 U2.8 | length 2.7
  Component Side w0.15: C6.2 40.8,31.75 ; U2.8 40.95,31.25 40.8,31.4 40.8,31.75 ; U2.7 40.8,31.75
NetC13_2: C13.2 M2.21
NetC14_2: C14.2 M2.24
NetP1_2: P1.2@17.3,53.2 U5.2
NetP2_2: P2.2@17.2,44.1 U5.4
NetP3_2: P3.2 U5.6
NetP4_2: P4.2
NetP5_2: P5.2 U5.12
NetP6_2: P6.2 U5.15
NetU4_4: U4.4
Sensors_MISO: M1.9 M2.5 M2.6
Sensors_MOSI: M1.24 M2.4
Sensors_SCLK: M1.23 M2.2
SPI_SENSOR_CS_ADC: P1.25
SPI_SENSOR_CS_BARO: P1.23
SPI_SENSOR_CS_GPS: P1.12 U4.18
SPI_SENSOR_CS_LSM_AG: P1.26
SPI_SENSOR_CS_LSM_M: P1.24
SPI_SENSOR_CS_MPU: P1.28
SPI_SENSOR_MISO: P1.10 U4.20
SPI_SENSOR_MOSI: P1.14 U4.21
SPI_SENSOR_SCL: P1.8 U4.19
SYS_DCIN: P1.36 P1.38
TELEM_RxD: P1.13
TELEM_TxD: P1.11
USB_D_N: P2.53
USB_D_P: P2.51
pads on no net: C9.1 C9.2 C10.1 C10.2 C11.1 C11.2 C12.1 C12.2 J1.16 J1.17 J2.16 J2.17 M1.2 M1.3 M1.4 M1.5 M1.6 M1.7 M1.10 M1.12 M1.14 M1.15 M1.16 M1.17 M1.19 M1.21 M2.9 M2.10 M2.11 M2.12 M2.13 P1.3@22,57.75 P1.4 P1.5 P1.6 P1.7 P1.9 P1.15 P1.17 P1.19 P1.21 P1.27 P2. P2.3 P2.5 P2.15 P2.17 P2.57 P2.60 P3.3 P4.3 P5.3 P6.3 R9.1 U3.12 U3.15 U4.1 U4.3 U4.5 U4.6 U4.8 U4.9 U4.11 U4.14 U4.15 U4.16 U4.17 U5.10
copper on no net:
  other v1: 40.254,19.9

## Polygon pours and split planes (outlines as drawn)
GND on Ground Plane (split plane): 94.49,10.51 10.51,10.51 10.51,63.49 94.49,63.49
3V3 on Power Plane (split plane): 94.49,10.51 10.51,10.51 10.51,63.49 94.49,63.49

## Silkscreen, mask and mechanical layers (free items; w line width, h text height)
Mechanical 1:
  the board outline again, w0.5

## Text inside footprints (layer, text, board x,y; h text height)
P1: Bottom Overlay "2" at 16.952,61.762 h1.27 r180; Bottom Overlay "40" at 60.386,61.762 h1.27 r180; Bottom Overlay "39" at 60.386,59.222 h1.27 r180; Bottom Overlay "1" at 16.952,59.222 h1.27 r180
P2: Bottom Overlay "2" at 30.558,30.784 h1.27 r180; Bottom Overlay "60" at 53.672,30.657 h1.27 r180; Bottom Overlay "59" at 53.799,21.259 h1.27 r180; Bottom Overlay "1" at 30.431,21.259 h1.27 r180
U1: Top Overlay "*" at 44.997,34.463 h1.27 r180; Mechanical 13 "*" at 44.184,35.592 h1.27 r180
U2: Top Overlay "*" at 44.997,31.163 h1.27 r180; Mechanical 13 "*" at 44.184,32.292 h1.27 r180